# EAGLE board ArmBoardNew-New_Main_Board (EAGLE 8.4.1)
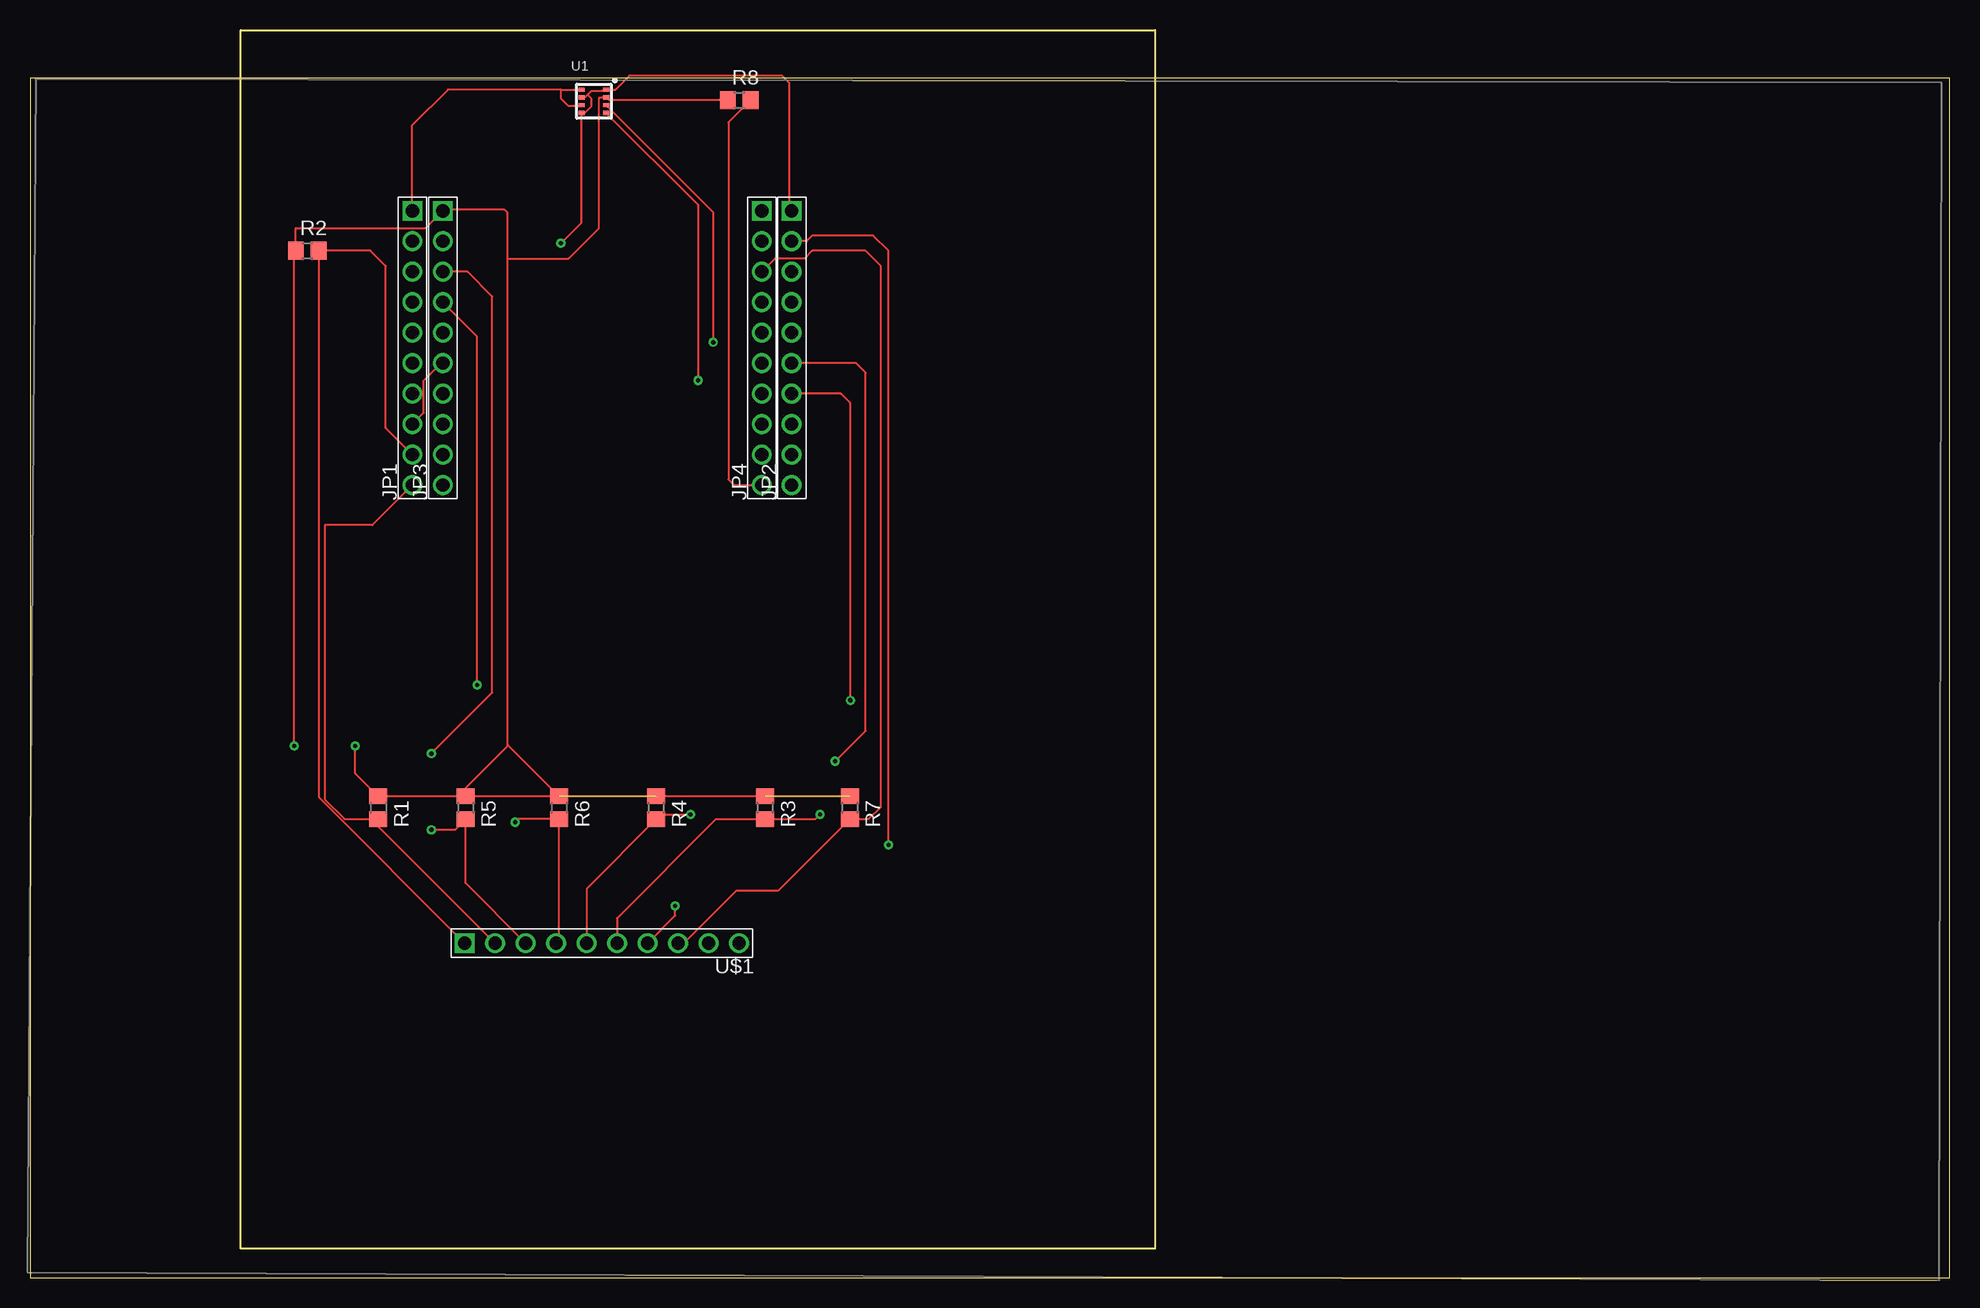
[diagram p0: board, top side]
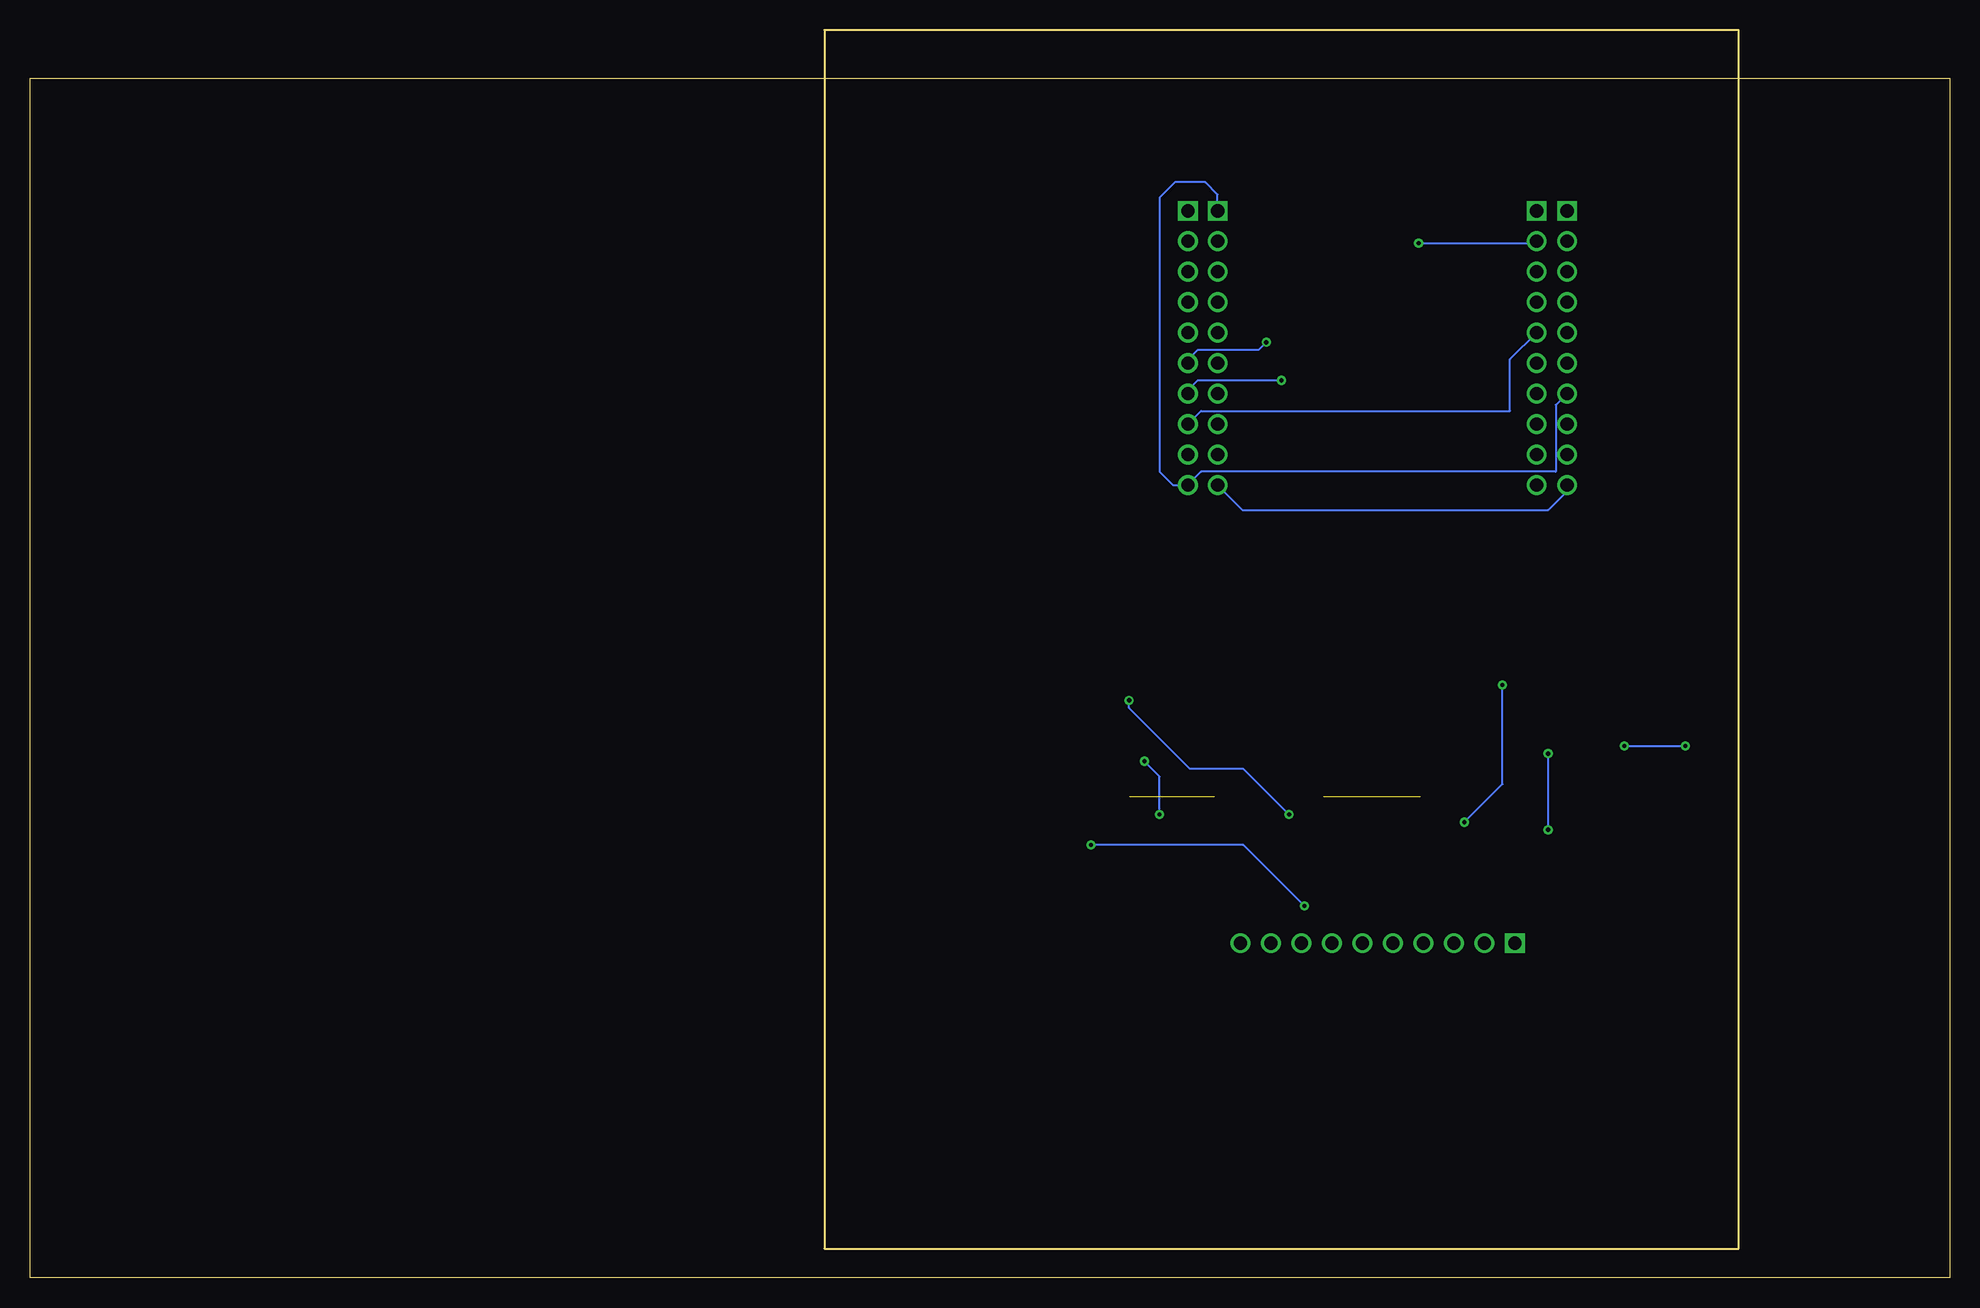
[diagram p1: board, bottom side, seen from below]

Size 160 x 104.03 mm. Coordinates in mm from the lower left corner, seen from the top.
Outline: 0,0 160,0 160,100 0,100 0,0
Copper layers (1*16): Top 0.035mm / dielectric 1.5mm / Bottom 0.035mm
Design rules "default": minimum track width 6mil, minimum drill 0.35mm, track to track 6mil, track to pad 6mil, pad to pad 6mil, via to via 6mil, smd to smd 6mil, copper to edge 40mil, drill to drill 6mil, minimum pad ring 10mil, minimum via ring 8mil, stop-mask expansion 4mil, vias tented up to drill 0mil, thermal gap 10mil

## Footprints (pad centres in the part's own frame; a part is rotated, then mirrored left to right if it is on the bottom)
KK254_10-PIN = drill 1.1 square: P$1 11.43,0 | drill 1.1: P$2 8.89,0; P$3 6.35,0; P$4 3.81,0; P$5 1.27,0; P$6 -1.27,0; P$7 -3.81,0; P$8 -6.35,0; P$9 -8.89,0; P$10 -11.43,0
R0805 = smd 1.3 x 1.5: 1 -0.95,0; 2 0.95,0
BME280_LGA = smd 0.5 x 0.35: P$1 1.025,0.975; P$2 1.025,0.325; P$3 1.025,-0.325; P$4 1.025,-0.975; P$5 -1.025,-0.975; P$6 -1.025,-0.325; P$7 -1.025,0.325; P$8 -1.025,0.975

## Placement (x,y rotation side)
JP1  KK254_10-PIN  [KK254_10-PIN]  31.87,77.53 90 top
JP2  KK254_10-PIN  [KK254_10-PIN]  63.49,77.53 90 top
JP3  KK254_10-PIN  [KK254_10-PIN]  34.41,77.53 90 top
JP4  KK254_10-PIN  [KK254_10-PIN]  61.01,77.53 90 top
R1  5k  [R0805]  29.03,39.19 270 top
R2  5k  [R0805]  23.11,85.64 0 top
R3  5k  [R0805]  61.27,39.19 270 top
R4  5k  [R0805]  52.19,39.19 270 top
R5  5k  [R0805]  36.3,39.19 270 top
R6  5k  [R0805]  44.11,39.19 270 top
R7  5k  [R0805]  68.33,39.19 270 top
R8  5k  [R0805]  59.11,98.19 0 top
U1  BME280  [BME280_LGA]  47,98.09 0 top
U$1  KK254_10-PIN  [KK254_10-PIN]  47.67,27.91 180 top

## Library data of the parts
JP1-JP4 U$1 = molex
R1-R8 = resistor
U1 = BME280ComponentLibrary; PROD_ID: IC-13090

## Nets
3.3V: JP1.P$1 U1.P$6 U1.P$8
5V: JP3.P$1 R1.1 R2.1 R3.1 R4.1 R5.1 R6.1 R7.1 R8.1 U1.P$2
ACT_SCL: JP1.P$9 R2.2 U$1.P$1
ACT_SDA: JP1.P$10 JP4.P$10 R1.2 R8.2 U$1.P$2
BATT_SCL: JP3.P$3 R5.2 U$1.P$3
BATT_SDA: JP3.P$4 R6.2 U$1.P$4
CANTX: JP4.P$2
CTS_MF: JP3.P$10
DGND: JP2.P$1 JP3.P$2 U1.P$1 U1.P$5 U1.P$7
EXT_SCL: JP2.P$7 R4.2 U1.P$4 U$1.P$5
EXT_SDA: JP2.P$6 R3.2 U1.P$3 U$1.P$6
INT_SCL: JP2.P$2 U$1.P$7
INT_SDA: JP4.P$3 R7.2 U$1.P$8
MISO: JP2.P$8 JP3.P$5
MOSI: JP1.P$8 JP3.P$6
N$9: U$1.P$9
N$10: U$1.P$10
PA3: JP2.P$9
PB5: JP1.P$2
PE2: JP3.P$8
PE3: JP3.P$9
RES: JP2.P$5
RTS_MF: JP2.P$4
RX_CF: JP2.P$3
RX_MC: JP4.P$4
RX_MD: JP4.P$8
RX_MF: JP1.P$3
RX_PF: JP1.P$5
RX_SF: JP4.P$6
SPI_CLK: JP1.P$7 JP2.P$10 JP4.P$1
TX_CF: JP3.P$7
TX_MC: JP4.P$5
TX_MD: JP4.P$9
TX_MF: JP1.P$4
TX_PF: JP1.P$6
TX_SF: JP4.P$7

## Tracks (layer width: path | path; a pad name or v marks a point on that pad's centre or on a via)
3.3V
  Top 0.152: 46.05,99.07 U1.P$8 44.25,99.07 | 46.06,97.68 U1.P$6 45.89,97.68 44.89,97.68 44.25,98.32 44.25,99.07 | JP1.P$1 31.87,96.1 34.84,99.07 44.25,99.07
5V  (via drill 0.35)  (2 unrouted)
  Top 0.152: R7.1 R1.1 27.11,42.07 v27.11,44.34 | R8.1 48.26,98.19 U1.P$2 47.53,98.42 47.43,98.32 47.43,87.52 44.89,84.98 39.81,84.98 | v22.03,44.34 22.03,85.51 R2.1 22.16,87.52 32.98,87.52 JP3.P$1 34.34,89.03 39.57,89.03 39.81,88.79 39.81,84.98 | 39.86,44.4 R6.1 | 39.86,44.4 39.81,44.45 39.81,84.98 | R5.1 36.3,40.84 39.86,44.4
  Bottom 0.152: v27.11,44.34 v22.03,44.34
ACT_SCL
  Top 0.152: U$1.P$1 24.06,40.08 R2.2 28.35,85.64 29.65,84.35 29.65,70.86 JP1.P$9
ACT_SDA
  Top 0.152: U$1.P$2 29.03,37.65 R1.2 26.22,38.24 24.57,39.9 24.57,62.76 28.53,62.76 JP1.P$10 | R8.2 58.22,96.34 58.22,66.57 58.69,66.1 JP4.P$10
  Bottom 0.152: JP4.P$10 58.94,64.03 33.46,64.03 31.87,65.61 JP1.P$10
BATT_SCL  (via drill 0.35)
  Top 0.152: U$1.P$3 36.3,32.92 R5.2 35.42,37.36 v33.46,37.36 | v33.46,43.71 38.54,48.79 38.54,81.81 36.47,83.88 JP3.P$3
  Bottom 0.152: v33.46,37.36 v33.46,43.71
BATT_SDA  (via drill 0.35)
  Top 0.152: U$1.P$4 44.02,28.07 44.11,28.16 R6.2 40.69,38.24 v40.44,37.99 | v37.27,49.42 37.27,78.48 JP3.P$4
  Bottom 0.152: v40.44,37.99 37.27,41.17 v37.27,49.42
DGND  (via drill 0.35)
  Top 0.152: JP2.P$1 63.3,89.14 63.3,99.59 62.67,100.22 49.97,100.22 48.81,99.07 U1.P$1 47.91,98.95 46.79,98.95 46.48,98.64 | v44.25,86.25 45.98,87.98 U1.P$5 46.23,97.12 46.79,97.68 46.79,98.32 46.48,98.64 | U1.P$7 46.26,98.42 46.48,98.64
  Bottom 0.152: v44.25,86.25 34.58,86.25 JP3.P$2
EXT_SCL  (via drill 0.35)
  Top 0.152: U$1.P$5 46.4,32.45 R4.2 52.58,38.63 v55.05,38.63 | v68.38,48.15 68.38,72.92 67.58,73.72 JP2.P$7 | U1.P$4 55.68,89.46 v55.68,74.82
  Bottom 0.152: v55.05,38.63 58.86,42.44 63.3,42.44 68.38,47.52 v68.38,48.15 | v55.68,74.82 62.67,74.82 63.49,74 JP2.P$7
EXT_SDA  (via drill 0.35)
  Top 0.152: U$1.P$6 48.94,29.98 57.2,38.24 R3.2 65.46,38.24 v65.84,38.63 | v67.11,43.07 69.65,45.61 69.65,75.46 68.85,76.26 JP2.P$6 | U1.P$3 56.95,88.84 v56.95,78
  Bottom 0.152: v65.84,38.63 65.84,41.8 v67.11,43.07 | v56.95,78 57.59,77.36 62.67,77.36 63.49,76.54 JP2.P$6
INT_SCL  (via drill 0.35)
  Top 0.152: U$1.P$7 53.78,30.21 v53.78,31.01 | v71.56,36.09 71.56,85.62 70.29,86.89 65.21,86.89 64.74,86.42 JP2.P$2
  Bottom 0.152: v53.78,31.01 58.86,36.09 v71.56,36.09
INT_SDA
  Top 0.152: U$1.P$8 54.49,27.91 58.86,32.28 62.37,32.28 R7.2 69.9,38.24 70.92,39.26 70.92,84.35 69.65,85.62 65.21,85.62 64.57,84.98 62.11,84.98 JP4.P$3
MISO
  Bottom 0.152: JP2.P$8 62.38,72.28 36.63,72.28 36.63,76.58 JP3.P$5
MOSI
  Top 0.152: JP1.P$8 32.82,72.13 32.82,74.82 34.26,76.26 JP3.P$6
SPI_CLK  (via drill 0.35)
  Bottom 0.152: JP1.P$7 32.82,72.77 32.82,67.2 62.38,67.2 JP2.P$10 64.74,66.1 65.84,67.2 65.84,90.06 64.57,91.33 62.03,91.33 61.01,90.31 JP4.P$1
  other vias: 61.01,88.96